# Altium PCB CH32H417QEU-R1.PcbDoc (part 5 of 6)
Units mm, origin at the board's own origin, x right, y up, seen from the top; angles counter-clockwise.
Board outline 125 x 85 mm, 4 copper layers (Top Layer, Layer 1, Layer 2, Bottom Layer), stack 0.603 mm thick; 271 components, 256 nets, 1068 pads, 903 vias.
Unrouted connection lines stored in the file: 143.
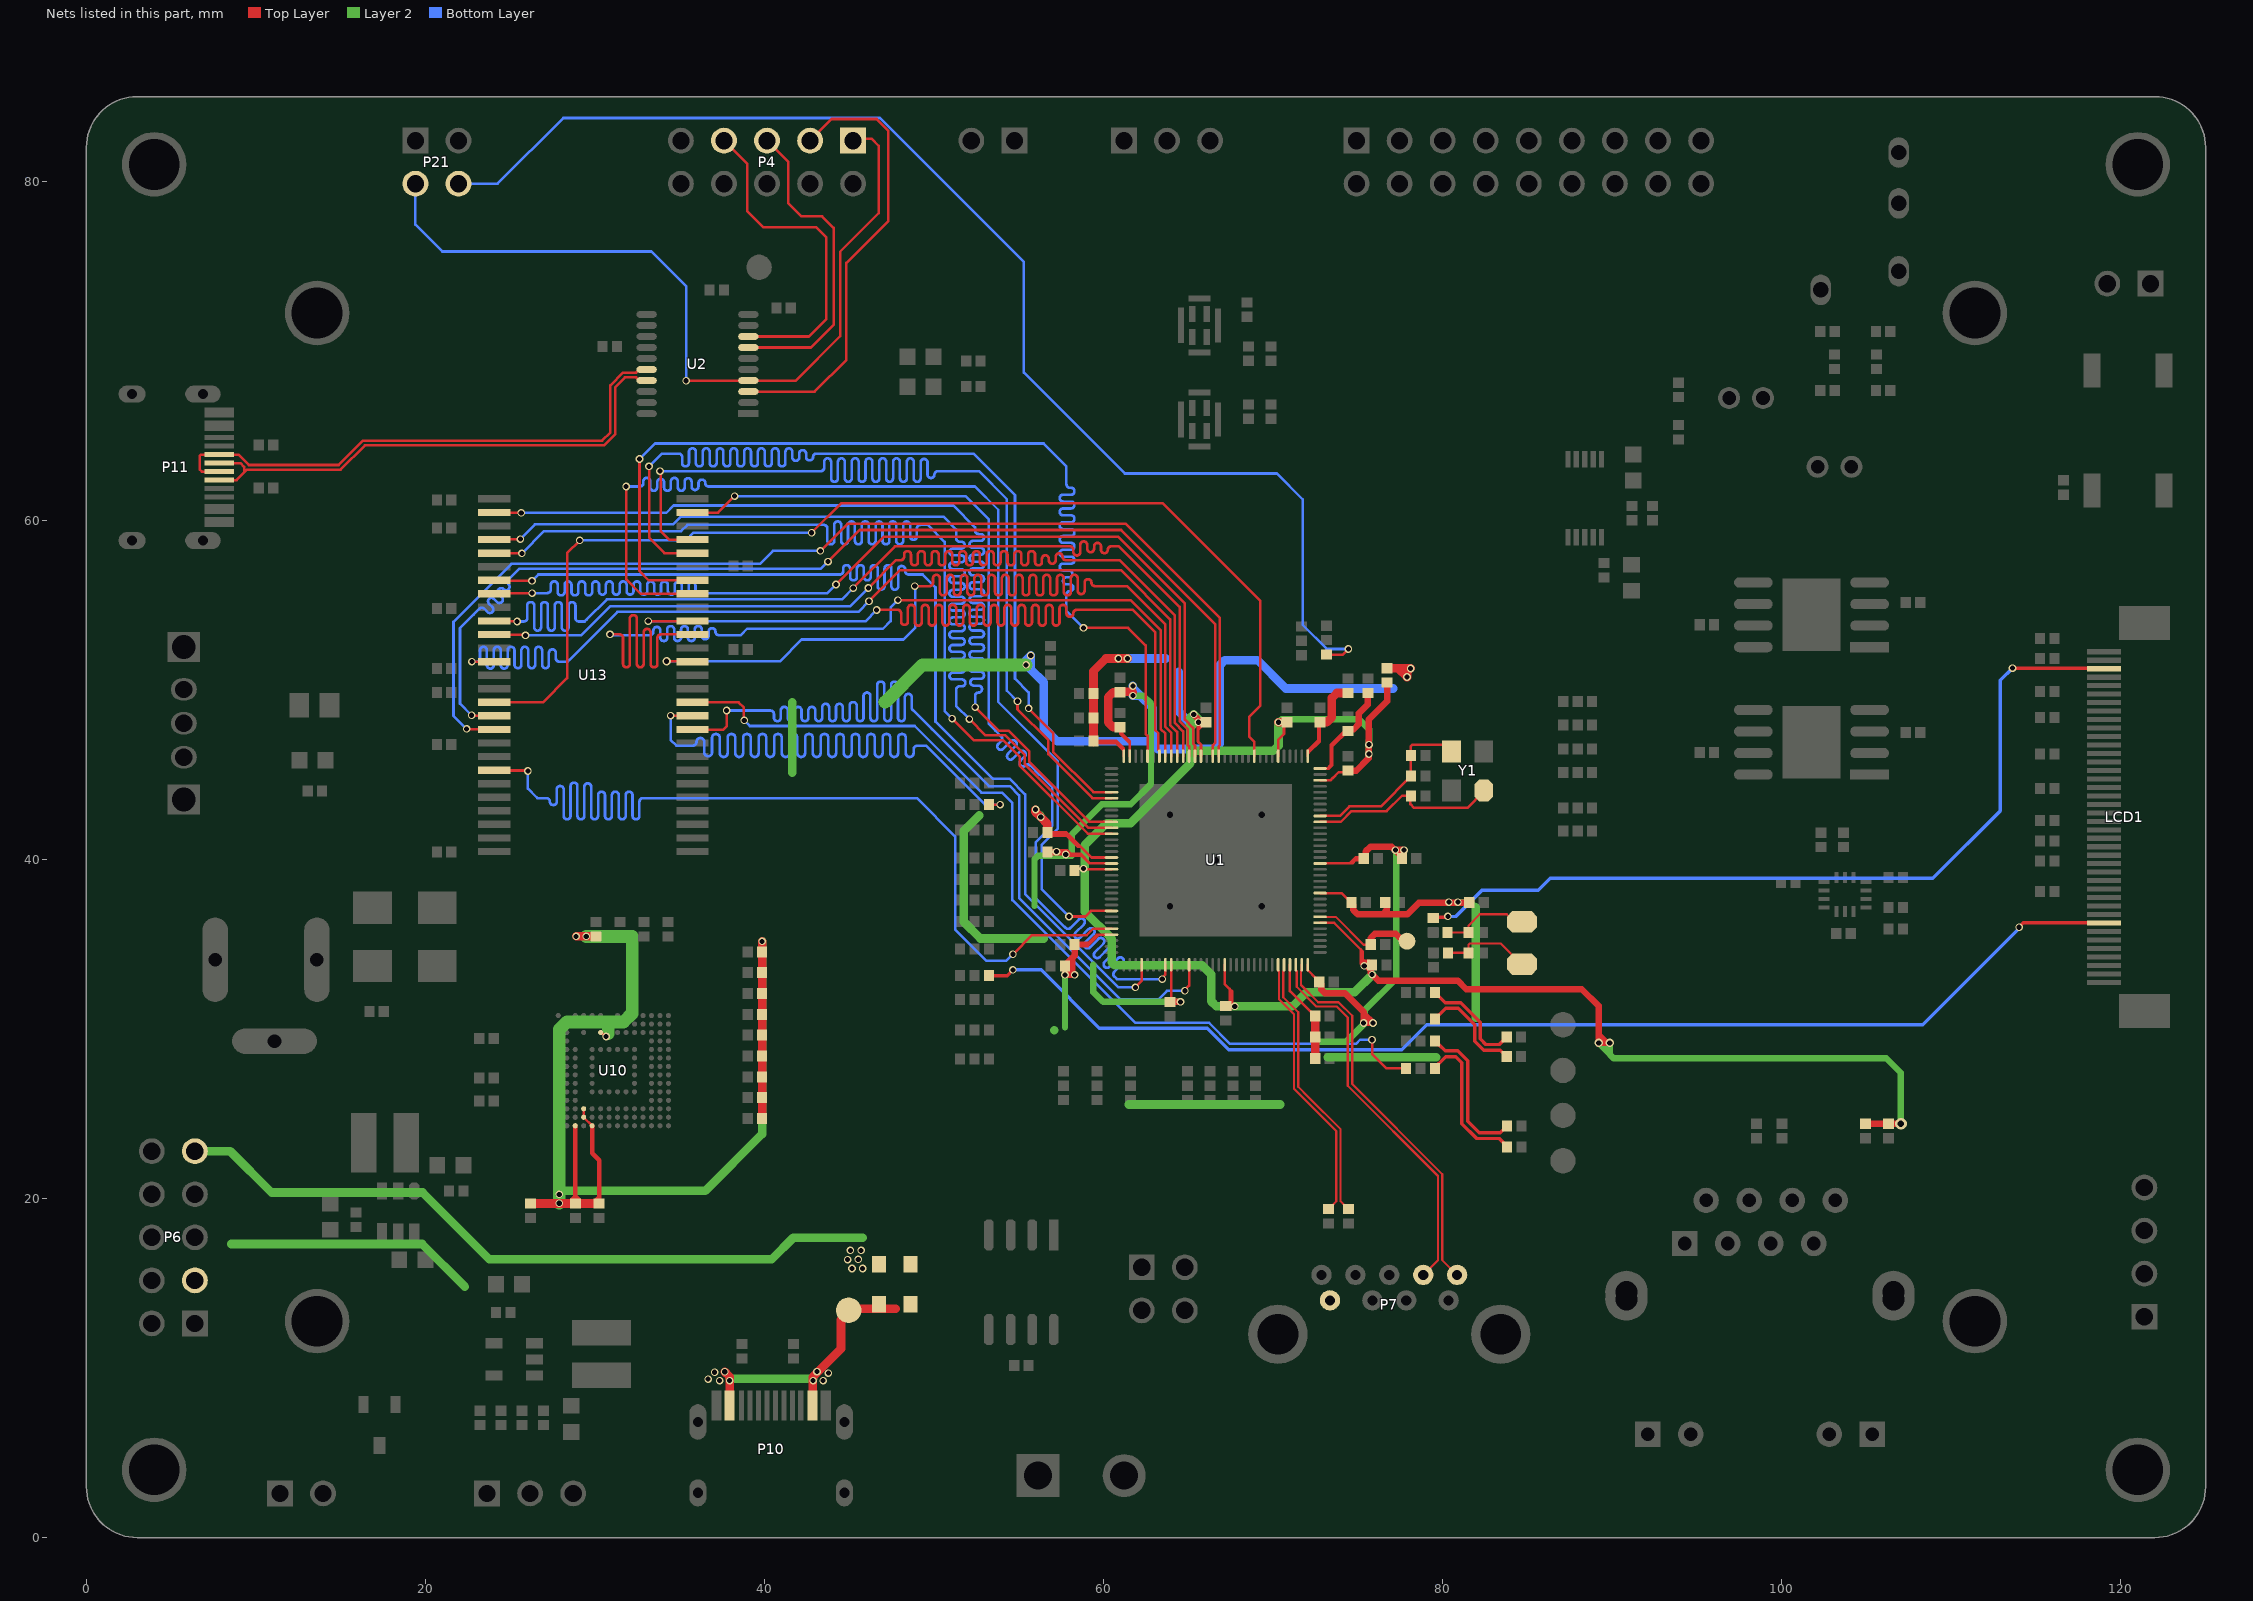
[diagram p7: the nets of this part, all layers, seen from the top]

## Via types
v1: diameter 0.45, hole 0.3, Top Layer to Bottom Layer, tented both sides, 534 vias
v2: diameter 0.5, hole 0.3, Top Layer to Bottom Layer, tented both sides, 320 vias
v3: diameter 0.711, hole 0.406, Top Layer to Bottom Layer, tented both sides, 24 vias
v4: diameter 0.508, hole 0.305, Top Layer to Bottom Layer, tented both sides, 22 vias
v5: diameter 0.7, hole 0.4, Top Layer to Bottom Layer, tented both sides, 3 vias

## Nets (pads, with @x,y where several pads share a name; then routed paths per layer and width w, separated by ;. In a path a pad name is that pad's centre, name@x,y a point inside that pad or via, vN(x,y) a via of type N, cw(c..) or ccw(c..) an arc to the next point about the centre after c; other vN are vias at no path point) (continued)
SDRAM_BA1: U1.92 U13.21 | length 66.3
  Top Layer w0.152: U13.21@24.064,45.27 24.088,45.246 26.011,45.246 v1(26.035,45.221) ; v1(54.648,34.408) 55.773,35.533 59.005,35.533 59.389,35.917 U1.92@60.466,35.917
  Bottom Layer w0.152: v1(26.035,45.221) 26.035,44.188 26.564,43.66 26.607,43.617 27.134,43.617 cw(c27.134,43.413) 27.337,43.413 ccw(c27.54,43.413) 27.743,43.413 27.743,44.13 cw(c27.946,44.13) 28.15,44.13 28.15,42.571 ccw(c28.353,42.571) 28.556,42.571 28.556,44.332 cw(c28.759,44.332) 28.962,44.332 28.962,42.571 ccw(c29.166,42.571) 29.369,42.571 29.369,44.285 cw(c29.572,44.285) 29.775,44.285 29.775,42.571 ccw(c29.978,42.571) 30.182,42.571 30.182,43.794 cw(c30.385,43.794) 30.588,43.794 30.588,42.571 ccw(c30.791,42.571) 30.994,42.571 30.994,43.794 cw(c31.198,43.794) 31.401,43.794 31.401,42.571 ccw(c31.604,42.571) 31.807,42.571 31.807,43.794 cw(c32.01,43.794) 32.214,43.794 32.214,42.571 ccw(c32.417,42.571) 32.62,42.571 32.62,43.413 cw(c32.823,43.413) 32.823,43.617 32.899,43.617 48.993,43.617 51.242,41.367 51.242,35.861 53.065,34.037 54.269,34.037 54.639,34.408 v1(54.648,34.408)
SDRAM_D0: U1.74 U13.2 | length 66.3
  Top Layer w0.152: U13.2@24.064,60.47 24.078,60.457 25.636,60.457 v1(25.649,60.443) ; v1(52.422,48.984) 53.811,47.595 54.4,47.595 55.622,46.373 55.622,45.759 59.164,42.217 U1.74@60.466,42.217
  Bottom Layer w0.152: v1(25.649,60.443) 34.202,60.443 34.638,60.879 51.136,60.879 52.422,59.593 52.422,59.473 52.422,59.397 ccw(c52.625,59.397) 52.625,59.194 52.743,59.194 cw(c52.743,58.991) 52.743,58.787 52.291,58.787 ccw(c52.291,58.584) 52.291,58.381 52.743,58.381 cw(c52.743,58.178) 52.743,57.975 52.291,57.975 ccw(c52.291,57.771) 52.291,57.568 52.743,57.568 cw(c52.743,57.365) 52.743,57.162 52.291,57.162 ccw(c52.291,56.959) 52.291,56.755 52.743,56.755 cw(c52.743,56.552) 52.743,56.349 52.291,56.349 ccw(c52.291,56.146) 52.291,55.943 52.743,55.943 cw(c52.743,55.739) 52.743,55.536 52.291,55.536 ccw(c52.291,55.333) 52.291,55.13 52.743,55.13 cw(c52.743,54.927) 52.743,54.723 52.291,54.723 ccw(c52.291,54.52) 52.291,54.317 52.743,54.317 cw(c52.743,54.114) 52.743,53.911 52.291,53.911 ccw(c52.291,53.707) 52.291,53.504 52.743,53.504 cw(c52.743,53.301) 52.743,53.098 52.291,53.098 ccw(c52.291,52.895) 52.291,52.691 52.743,52.691 cw(c52.743,52.488) 52.743,52.285 52.291,52.285 ccw(c52.291,52.082) 52.291,51.879 52.743,51.879 cw(c52.743,51.675) 52.743,51.472 52.291,51.472 ccw(c52.291,51.269) 52.291,51.066 52.743,51.066 cw(c52.743,50.863) 52.743,50.659 52.343,50.659 ccw(c52.343,50.456) 52.343,50.253 52.626,50.253 cw(c52.626,50.05) 52.626,49.847 ccw(c52.625,49.643) 52.422,49.643 52.422,49.321 v1(52.422,48.984)
SDRAM_D1: U1.75 U13.4 | length 66.3
  Top Layer w0.152: U13.4@24.064,58.87 24.077,58.883 25.584,58.883 v1(25.597,58.897) ; v1(52.084,48.276) 53.044,47.316 54.206,47.316 55.343,46.179 55.343,45.643 59.119,41.867 U1.75@60.466,41.867
  Bottom Layer w0.152: v1(25.597,58.897) 26.462,59.762 34.61,59.762 35.066,60.218 50.555,60.218 51.299,59.474 51.299,59.027 51.299,58.95 ccw(c51.502,58.95) 51.502,58.747 51.605,58.747 cw(c51.605,58.544) 51.605,58.341 51.108,58.341 ccw(c51.108,58.138) 51.108,57.934 51.605,57.934 cw(c51.605,57.731) 51.605,57.528 51.108,57.528 ccw(c51.108,57.325) 51.108,57.122 51.605,57.122 cw(c51.605,56.918) 51.605,56.715 51.108,56.715 ccw(c51.108,56.512) 51.108,56.309 51.605,56.309 cw(c51.605,56.106) 51.605,55.902 51.108,55.902 ccw(c51.108,55.699) 51.108,55.496 51.605,55.496 cw(c51.605,55.293) 51.605,55.09 51.108,55.09 ccw(c51.108,54.886) 51.108,54.683 51.605,54.683 cw(c51.605,54.48) 51.605,54.277 51.108,54.277 ccw(c51.108,54.074) 51.108,53.87 51.605,53.87 cw(c51.605,53.667) 51.605,53.464 51.108,53.464 ccw(c51.108,53.261) 51.108,53.058 51.605,53.058 cw(c51.605,52.854) 51.605,52.651 51.108,52.651 ccw(c51.108,52.448) 51.108,52.245 51.605,52.245 cw(c51.605,52.042) 51.605,51.838 51.108,51.838 ccw(c51.108,51.635) 51.108,51.432 51.605,51.432 cw(c51.605,51.229) 51.605,51.026 51.108,51.026 ccw(c51.108,50.822) 51.108,50.619 51.641,50.619 cw(c51.641,50.416) 51.641,50.213 51.502,50.213 ccw(c51.502,50.01) 51.299,50.01 51.299,49.432 51.299,49.06 v1(52.084,48.276)
SDRAM_D2: U1.76 U13.5 | length 66.3
  Top Layer w0.152: U13.5@24.064,58.07 24.07,58.064 25.682,58.064 v1(25.689,58.058) ; v1(51.062,48.31) 52.336,47.036 54.069,47.036 55.063,46.043 55.063,45.527 59.074,41.517 U1.76@60.466,41.517
  Bottom Layer w0.152: v1(25.689,58.058) 27,59.369 35.086,59.369 35.449,59.732 43.02,59.732 43.502,59.732 cw(c43.502,59.529) 43.705,59.529 43.705,58.792 ccw(c43.909,58.792) 44.112,58.792 44.112,59.735 cw(c44.315,59.735) 44.518,59.735 44.518,58.792 ccw(c44.721,58.792) 44.925,58.792 44.925,59.735 cw(c45.128,59.735) 45.331,59.735 45.331,58.792 ccw(c45.534,58.792) 45.737,58.792 45.737,59.735 cw(c45.941,59.735) 46.144,59.735 46.144,58.792 ccw(c46.347,58.792) 46.55,58.792 46.55,59.735 cw(c46.753,59.735) 46.957,59.735 46.957,58.792 ccw(c47.16,58.792) 47.363,58.792 47.363,59.735 cw(c47.566,59.735) 47.769,59.735 47.769,58.792 ccw(c47.973,58.792) 48.176,58.792 48.176,59.735 cw(c48.379,59.735) 48.582,59.735 48.582,59.058 ccw(c48.785,59.058) 48.989,59.058 48.989,59.529 cw(c49.192,59.529) 49.192,59.732 49.506,59.732 49.63,59.732 50.625,58.737 50.625,48.747 v1(51.062,48.31)
SDRAM_D3: U1.100 U13.7 | length 66.3
  Top Layer w0.152: U13.7@24.064,56.47 24.082,56.452 26.263,56.452 v1(26.28,56.435) ; v1(61.874,32.458) 61.874,32.472 62.241,32.84 U1.100@62.241,33.792
  Bottom Layer w0.152: v1(26.28,56.435) 26.654,56.809 44.358,56.809 44.434,56.809 ccw(c44.434,57.012) 44.637,57.012 44.637,57.163 cw(c44.841,57.163) 45.044,57.163 45.044,56.662 ccw(c45.247,56.662) 45.45,56.662 45.45,57.163 cw(c45.653,57.163) 45.857,57.163 45.857,56.669 ccw(c46.06,56.669) 46.263,56.669 46.263,57.163 cw(c46.466,57.163) 46.669,57.163 46.669,56.117 ccw(c46.873,56.117) 47.076,56.117 47.076,57.163 cw(c47.279,57.163) 47.482,57.163 47.482,56.117 ccw(c47.685,56.117) 47.889,56.117 47.889,57.108 cw(c48.092,57.108) 48.295,57.108 48.295,57.012 ccw(c48.498,57.012) 48.498,56.809 49.321,56.809 50.085,56.045 50.085,48.131 53.45,44.765 54.441,44.765 55.371,43.835 55.371,37.961 60.874,32.458 v1(61.874,32.458)
SDRAM_D4: U1.52 U13.8 | length 66.3
  Top Layer w0.152: U13.8@24.064,55.67 24.086,55.692 26.269,55.692 v1(26.291,55.714) ; v1(44.216,56.22) 47.034,59.038 60.861,59.038 64.797,55.103 64.797,48.246 65.277,47.767 65.277,46.827 65.391,46.712 U1.52@65.391,46.092
  Bottom Layer w0.152: v1(26.291,55.714) 27.113,55.714 27.189,55.714 ccw(c27.189,55.917) 27.392,55.917 27.392,56.197 cw(c27.596,56.197) 27.799,56.197 27.799,55.778 ccw(c28.002,55.778) 28.205,55.778 28.205,56.197 cw(c28.408,56.197) 28.612,56.197 28.612,55.778 ccw(c28.815,55.778) 29.018,55.778 29.018,56.197 cw(c29.221,56.197) 29.424,56.197 29.424,55.778 ccw(c29.628,55.778) 29.831,55.778 29.831,56.197 cw(c30.034,56.197) 30.237,56.197 30.237,55.821 ccw(c30.44,55.821) 30.644,55.821 30.644,56.197 cw(c30.847,56.197) 31.05,56.197 31.05,55.826 ccw(c31.253,55.826) 31.456,55.826 31.456,56.197 cw(c31.66,56.197) 31.863,56.197 31.863,55.826 ccw(c32.066,55.826) 32.269,55.826 32.269,56.197 cw(c32.472,56.197) 32.676,56.197 32.676,55.826 ccw(c32.879,55.826) 33.082,55.826 33.082,56.197 cw(c33.285,56.197) 33.488,56.197 33.488,55.826 ccw(c33.692,55.826) 33.895,55.826 33.895,56.197 cw(c34.098,56.197) 34.301,56.197 34.301,55.826 ccw(c34.504,55.826) 34.708,55.826 34.708,56.197 cw(c34.911,56.197) 35.114,56.197 35.114,55.826 ccw(c35.317,55.826) 35.52,55.826 35.52,56.151 cw(c35.724,56.151) 35.927,56.151 35.927,55.917 ccw(c36.13,55.917) 36.13,55.714 37.376,55.714 43.71,55.714 v1(44.216,56.22)
SDRAM_D5: U1.53 U13.10 | length 66.3
  Top Layer w0.152: U13.10@24.064,54.07 24.08,54.054 25.39,54.054 v1(25.406,54.038) ; v1(45.231,56.005) 47.696,58.471 57.532,58.471 58.015,58.471 cw(c58.015,58.267) 58.218,58.267 58.218,58.134 ccw(c58.421,58.134) 58.624,58.134 58.624,58.556 cw(c58.827,58.556) 59.031,58.556 59.031,58.325 ccw(c59.234,58.325) 59.437,58.325 59.437,58.471 cw(c59.64,58.471) 59.843,58.471 59.843,58.267 ccw(c60.047,58.267) 60.25,58.267 cw(c60.453,58.267) 60.453,58.471 60.899,58.471 61.027,58.342 64.48,54.89 64.48,48.168 64.971,47.677 64.971,46.737 65.041,46.667 U1.53@65.041,46.092
  Bottom Layer w0.152: v1(25.406,54.038) 25.725,54.038 25.801,54.038 ccw(c25.801,54.241) 26.004,54.241 26.004,54.978 cw(c26.208,54.978) 26.411,54.978 26.411,53.699 ccw(c26.614,53.699) 26.817,53.699 26.817,54.978 cw(c27.02,54.978) 27.224,54.978 27.224,53.699 ccw(c27.427,53.699) 27.63,53.699 27.63,54.978 cw(c27.833,54.978) 28.036,54.978 28.036,53.699 ccw(c28.24,53.699) 28.443,53.699 28.443,54.978 cw(c28.646,54.978) 28.849,54.978 28.849,54.241 ccw(c29.052,54.241) 29.052,54.038 29.392,54.038 29.504,54.15 30.698,55.343 44.576,55.343 45.231,55.998 v1(45.231,56.005)
SDRAM_D6: U1.54 U13.11 | length 66.3
  Top Layer w0.152: U13.11@24.064,53.269 24.09,53.243 25.872,53.243 v1(25.898,53.217) ; v1(46.127,56.013) 47.766,57.652 47.953,57.652 48.029,57.652 ccw(c48.029,57.855) 48.233,57.855 48.233,57.988 cw(c48.436,57.988) 48.639,57.988 48.639,57.551 ccw(c48.842,57.551) 49.045,57.551 49.045,57.988 cw(c49.249,57.988) 49.452,57.988 49.452,57.551 ccw(c49.655,57.551) 49.858,57.551 49.858,57.988 cw(c50.061,57.988) 50.265,57.988 50.265,57.551 ccw(c50.468,57.551) 50.671,57.551 50.671,57.988 cw(c50.874,57.988) 51.077,57.988 51.077,57.551 ccw(c51.281,57.551) 51.484,57.551 51.484,57.988 cw(c51.687,57.988) 51.89,57.988 51.89,57.551 ccw(c52.093,57.551) 52.297,57.551 52.297,57.988 cw(c52.5,57.988) 52.703,57.988 52.703,57.551 ccw(c52.906,57.551) 53.109,57.551 53.109,57.988 cw(c53.313,57.988) 53.516,57.988 53.516,57.551 ccw(c53.719,57.551) 53.922,57.551 53.922,57.988 cw(c54.125,57.988) 54.329,57.988 54.329,57.551 ccw(c54.532,57.551) 54.735,57.551 54.735,57.988 cw(c54.938,57.988) 55.141,57.988 55.141,57.551 ccw(c55.345,57.551) 55.548,57.551 55.548,57.988 cw(c55.751,57.988) 55.954,57.988 55.954,57.551 ccw(c56.157,57.551) 56.361,57.551 56.361,57.735 cw(c56.564,57.735) 56.767,57.735 56.767,57.652 ccw(c56.97,57.652) 57.173,57.652 57.173,57.855 cw(c57.377,57.855) 57.58,57.855 ccw(c57.783,57.855) 57.783,57.652 58.524,57.652 60.93,57.652 64.2,54.381 64.2,48.053 64.691,47.562 U1.54@64.691,46.092
  Bottom Layer w0.152: v1(25.898,53.217) 29.171,53.217 30.887,54.932 45.047,54.932 v1(46.127,56.013)
SDRAM_D7: U1.55 U13.13 | length 66.3
  Top Layer w0.152: v1(22.734,51.667) 22.735,51.669 24.062,51.669 U13.13@24.064,51.67 ; v1(46.163,55.232) 48,57.069 61.018,57.069 63.921,54.166 63.921,47.937 64.341,47.517 U1.55@64.341,46.092
  Bottom Layer w0.152: v1(22.734,51.667) 22.939,51.667 23.015,51.667 ccw(c23.015,51.871) 23.218,51.871 23.218,52.342 cw(c23.422,52.342) 23.625,52.342 23.625,51.462 ccw(c23.828,51.462) 24.031,51.462 24.031,52.342 cw(c24.234,52.342) 24.438,52.342 24.438,51.462 ccw(c24.641,51.462) 24.844,51.462 24.844,52.342 cw(c25.047,52.342) 25.25,52.342 25.25,51.483 ccw(c25.454,51.483) 25.657,51.483 25.657,52.342 cw(c25.86,52.342) 26.063,52.342 26.063,51.483 ccw(c26.266,51.483) 26.47,51.483 26.47,52.342 cw(c26.673,52.342) 26.876,52.342 26.876,51.483 ccw(c27.079,51.483) 27.282,51.483 27.282,52.19 cw(c27.486,52.19) 27.689,52.19 27.689,51.871 ccw(c27.892,51.871) 27.892,51.667 28.381,51.667 28.486,51.772 31.319,54.606 45.537,54.606 v1(46.163,55.232)
SDRAM_D8: U1.56 U13.42 | length 66.3
  Top Layer w0.152: v2(34.227,51.692) 34.238,51.681 35.737,51.681 U13.42@35.748,51.67 ; v1(48.862,56.126) 49.657,56.126 49.733,56.126 ccw(c49.733,56.329) 49.936,56.329 49.936,56.586 cw(c50.139,56.586) 50.343,56.586 50.343,55.778 ccw(c50.546,55.778) 50.749,55.778 50.749,56.586 cw(c50.952,56.586) 51.155,56.586 51.155,55.778 ccw(c51.359,55.778) 51.562,55.778 51.562,56.586 cw(c51.765,56.586) 51.968,56.586 51.968,55.778 ccw(c52.171,55.778) 52.375,55.778 52.375,56.586 cw(c52.578,56.586) 52.781,56.586 52.781,55.778 ccw(c52.984,55.778) 53.187,55.778 53.187,56.586 cw(c53.391,56.586) 53.594,56.586 53.594,55.778 ccw(c53.797,55.778) 54,55.778 54,56.586 cw(c54.203,56.586) 54.407,56.586 54.407,55.778 ccw(c54.61,55.778) 54.813,55.778 54.813,56.586 cw(c55.016,56.586) 55.219,56.586 55.219,55.778 ccw(c55.423,55.778) 55.626,55.778 55.626,56.586 cw(c55.829,56.586) 56.032,56.586 56.032,55.778 ccw(c56.235,55.778) 56.439,55.778 56.439,56.586 cw(c56.642,56.586) 56.845,56.586 56.845,55.778 ccw(c57.048,55.778) 57.251,55.778 57.251,56.586 cw(c57.455,56.586) 57.658,56.586 57.658,55.778 ccw(c57.861,55.778) 58.064,55.778 58.064,56.586 cw(c58.267,56.586) 58.471,56.586 58.471,55.856 ccw(c58.674,55.856) 58.877,55.856 58.877,56.329 cw(c59.08,56.329) 59.283,56.329 ccw(c59.487,56.329) 59.487,56.126 60.37,56.126 61.366,56.126 63.641,53.85 63.641,47.821 63.991,47.471 U1.56@63.991,46.092
  Bottom Layer w0.152: v2(34.227,51.692) 34.236,51.683 40.903,51.683 42.193,52.973 48.193,52.973 48.898,53.679 48.898,56.09 v1(48.862,56.126)
SDRAM_D9: U1.57 U13.44 | length 66.3
  Top Layer w0.152: v1(30.882,53.277) 30.886,53.273 30.966,53.273 31.448,53.273 cw(c31.448,53.07) 31.652,53.07 31.652,51.54 ccw(c31.855,51.54) 32.058,51.54 32.058,54.213 cw(c32.261,54.213) 32.464,54.213 32.464,51.54 ccw(c32.668,51.54) 32.871,51.54 32.871,53.398 cw(c33.074,53.398) 33.277,53.398 33.277,51.54 ccw(c33.48,51.54) 33.684,51.54 33.684,53.07 cw(c33.887,53.07) 33.887,53.273 34.317,53.273 35.744,53.273 U13.44@35.748,53.269 ; v1(47.863,55.295) 61.598,55.295 63.362,53.531 63.362,47.706 63.641,47.426 U1.57@63.641,46.092
  Bottom Layer w0.152: v1(30.882,53.277) 30.926,53.233 33.168,53.233 33.244,53.233 ccw(c33.244,53.436) 33.447,53.436 33.447,53.515 cw(c33.651,53.515) 33.854,53.515 33.854,53.088 ccw(c34.057,53.088) 34.26,53.088 34.26,53.561 cw(c34.463,53.561) 34.667,53.561 34.667,53.088 ccw(c34.87,53.088) 35.073,53.088 35.073,53.561 cw(c35.276,53.561) 35.479,53.561 35.479,53.088 ccw(c35.683,53.088) 35.886,53.088 35.886,53.561 cw(c36.089,53.561) 36.292,53.561 36.292,53.192 ccw(c36.495,53.192) 36.699,53.192 36.699,53.436 cw(c36.902,53.436) 37.105,53.436 ccw(c37.308,53.436) 37.308,53.233 38.371,53.233 38.598,53.233 38.974,53.609 46.98,53.609 47.439,54.068 47.439,54.872 v1(47.863,55.295)
SDRAM_D10: U1.58 U13.45 | length 66.2
  Top Layer w0.152: v1(33.142,54.055) 33.15,54.062 35.74,54.062 U13.45@35.748,54.07 ; v1(46.612,54.714) 46.622,54.724 47.366,54.724 47.849,54.724 cw(c47.849,54.521) 48.052,54.521 48.052,54.041 ccw(c48.255,54.041) 48.459,54.041 48.459,54.813 cw(c48.662,54.813) 48.865,54.813 48.865,54 ccw(c49.068,54) 49.271,54 49.271,54.813 cw(c49.475,54.813) 49.678,54.813 49.678,54 ccw(c49.881,54) 50.084,54 50.084,54.813 cw(c50.287,54.813) 50.491,54.813 50.491,54 ccw(c50.694,54) 50.897,54 50.897,54.813 cw(c51.1,54.813) 51.303,54.813 51.303,54 ccw(c51.507,54) 51.71,54 51.71,54.813 cw(c51.913,54.813) 52.116,54.813 52.116,54 ccw(c52.319,54) 52.523,54 52.523,54.813 cw(c52.726,54.813) 52.929,54.813 52.929,54 ccw(c53.132,54) 53.335,54 53.335,54.813 cw(c53.539,54.813) 53.742,54.813 53.742,54 ccw(c53.945,54) 54.148,54 54.148,54.813 cw(c54.351,54.813) 54.555,54.813 54.555,54 ccw(c54.758,54) 54.961,54 54.961,54.813 cw(c55.164,54.813) 55.367,54.813 55.367,54 ccw(c55.571,54) 55.774,54 55.774,54.813 cw(c55.977,54.813) 56.18,54.813 56.18,54 ccw(c56.383,54) 56.587,54 56.587,54.813 cw(c56.79,54.813) 56.993,54.813 56.993,54 ccw(c57.196,54) 57.399,54 57.399,54.813 cw(c57.603,54.813) 57.806,54.813 57.806,54.517 ccw(c58.009,54.517) 58.212,54.517 58.212,54.521 cw(c58.415,54.521) 58.415,54.724 58.77,54.724 61.72,54.724 63.035,53.409 63.035,47.634 63.224,47.445 63.224,46.481 63.291,46.414 U1.58@63.291,46.092
  Bottom Layer w0.152: v1(33.142,54.055) 33.153,54.044 45.942,54.044 v1(46.612,54.714)
SDRAM_D11: U1.89 U13.47 | length 66.3
  Top Layer w0.152: v1(31.838,61.998) 31.838,56.531 32.698,55.67 U13.47@35.748,55.67 ; v1(57.957,36.638) 58.925,36.638 59.254,36.967 U1.89@60.466,36.967
  Bottom Layer w0.152: v1(31.838,61.998) 32.572,61.998 32.648,61.998 ccw(c32.648,62.201) 32.851,62.201 32.851,62.302 cw(c33.054,62.302) 33.258,62.302 33.258,61.95 ccw(c33.461,61.95) 33.664,61.95 33.664,62.247 cw(c33.867,62.247) 34.07,62.247 34.07,61.95 ccw(c34.274,61.95) 34.477,61.95 34.477,62.302 cw(c34.68,62.302) 34.883,62.302 34.883,61.95 ccw(c35.086,61.95) 35.29,61.95 35.29,62.287 cw(c35.493,62.287) 35.696,62.287 35.696,61.998 ccw(c35.899,61.998) 36.102,61.998 36.102,62.201 cw(c36.306,62.201) 36.509,62.201 ccw(c36.712,62.201) 36.712,61.998 38.125,61.998 52.416,61.998 53.786,60.628 53.786,49.295 57.296,45.785 57.296,41.813 56.344,40.86 56.344,38.251 v1(57.957,36.638)
SDRAM_D12: U1.60 U13.48 | length 66.3
  Top Layer w0.152: v1(32.622,63.618) 32.622,57.015 33.167,56.47 U13.48@35.748,56.47 ; v1(58.812,53.658) 61.452,53.658 62.476,52.633 62.476,47.403 62.591,47.288 U1.60@62.591,46.092
  Bottom Layer w0.152: v1(32.622,63.618) 33.538,64.534 56.459,64.534 57.807,63.186 57.807,62.202 57.807,62.126 ccw(c58.01,62.126) 58.01,61.923 58.077,61.923 cw(c58.077,61.72) 58.077,61.516 57.612,61.516 ccw(c57.612,61.313) 57.612,61.11 58.077,61.11 cw(c58.077,60.907) 58.077,60.704 57.612,60.704 ccw(c57.612,60.5) 57.612,60.297 58.077,60.297 cw(c58.077,60.094) 58.077,59.891 57.612,59.891 ccw(c57.612,59.688) 57.612,59.484 58.077,59.484 cw(c58.077,59.281) 58.077,59.078 57.612,59.078 ccw(c57.612,58.875) 57.612,58.672 58.077,58.672 cw(c58.077,58.468) 58.077,58.265 57.612,58.265 ccw(c57.612,58.062) 57.612,57.859 58.077,57.859 cw(c58.077,57.656) 58.077,57.452 57.612,57.452 ccw(c57.612,57.249) 57.612,57.046 57.959,57.046 cw(c57.959,56.843) 57.959,56.64 57.807,56.64 ccw(c57.807,56.436) 57.807,56.233 58.01,56.233 cw(c58.01,56.03) 58.01,55.827 ccw(c58.01,55.624) 57.807,55.624 57.807,54.992 57.807,54.663 v1(58.812,53.658)
SDRAM_D13: U1.69 U13.50 | length 66.3
  Top Layer w0.152: v1(33.187,63.188) 33.187,58.983 34.1,58.07 U13.50@35.748,58.07 ; v1(55.575,48.91) 57.019,47.466 57.019,46.337 59.389,43.967 U1.69@60.466,43.967
  Bottom Layer w0.152: v1(33.187,63.188) 33.941,63.941 34.451,63.941 34.934,63.941 cw(c34.934,63.738) 35.137,63.738 35.137,63.386 ccw(c35.34,63.386) 35.544,63.386 35.544,64.052 cw(c35.747,64.052) 35.95,64.052 35.95,63.386 ccw(c36.153,63.386) 36.356,63.386 36.356,64.052 cw(c36.56,64.052) 36.763,64.052 36.763,63.386 ccw(c36.966,63.386) 37.169,63.386 37.169,64.052 cw(c37.372,64.052) 37.576,64.052 37.576,63.386 ccw(c37.779,63.386) 37.982,63.386 37.982,64.052 cw(c38.185,64.052) 38.388,64.052 38.388,63.386 ccw(c38.592,63.386) 38.795,63.386 38.795,64.052 cw(c38.998,64.052) 39.201,64.052 39.201,63.386 ccw(c39.404,63.386) 39.608,63.386 39.608,64.052 cw(c39.811,64.052) 40.014,64.052 40.014,63.386 ccw(c40.217,63.386) 40.42,63.386 40.42,64.052 cw(c40.624,64.052) 40.827,64.052 40.827,63.386 ccw(c41.03,63.386) 41.233,63.386 41.233,64.052 cw(c41.436,64.052) 41.64,64.052 41.64,63.717 ccw(c41.843,63.717) 42.046,63.717 42.046,63.941 cw(c42.249,63.941) 42.452,63.941 42.452,63.738 ccw(c42.656,63.738) 42.859,63.738 cw(c43.062,63.738) 43.062,63.941 43.672,63.941 52.325,63.941 54.771,61.495 54.771,50.662 55.575,49.858 v1(55.575,48.91)
SDRAM_D14: U1.70 U13.51 | length 66.3
  Top Layer w0.152: v1(33.832,62.904) 33.871,62.865 33.871,59.376 34.376,58.87 U13.51@35.748,58.87 ; v1(54.92,49.331) 54.92,48.858 56.74,47.038 56.74,46.222 59.344,43.617 U1.70@60.466,43.617
  Bottom Layer w0.152: v1(33.832,62.904) 43.237,62.904 43.313,62.904 ccw(c43.313,63.107) 43.517,63.107 43.517,63.459 cw(c43.72,63.459) 43.923,63.459 43.923,62.481 ccw(c44.126,62.481) 44.329,62.481 44.329,63.459 cw(c44.533,63.459) 44.736,63.459 44.736,62.481 ccw(c44.939,62.481) 45.142,62.481 45.142,63.459 cw(c45.345,63.459) 45.549,63.459 45.549,62.481 ccw(c45.752,62.481) 45.955,62.481 45.955,63.459 cw(c46.158,63.459) 46.361,63.459 46.361,62.481 ccw(c46.565,62.481) 46.768,62.481 46.768,63.459 cw(c46.971,63.459) 47.174,63.459 47.174,62.481 ccw(c47.377,62.481) 47.581,62.481 47.581,63.459 cw(c47.784,63.459) 47.987,63.459 47.987,62.481 ccw(c48.19,62.481) 48.393,62.481 48.393,63.459 cw(c48.597,63.459) 48.8,63.459 48.8,62.481 ccw(c49.003,62.481) 49.206,62.481 49.206,63.423 cw(c49.409,63.423) 49.613,63.423 49.613,62.701 ccw(c49.816,62.701) 50.019,62.701 cw(c50.222,62.701) 50.222,62.904 51.145,62.904 52.637,62.904 54.286,61.255 54.286,49.966 v1(54.92,49.331)
SDRAM_D15: U1.104 U13.53 | length 66.3
  Top Layer w0.152: U13.53@35.748,60.47 35.755,60.463 37.267,60.463 v1(38.233,61.429) ; v1(63.457,32.937) 63.457,33.018 63.641,33.203 U1.104@63.641,33.792
  Bottom Layer w0.152: v1(38.233,61.429) 51.863,61.429 53.226,60.066 53.226,47.996 53.614,47.608 53.667,47.554 53.955,47.267 cw(c53.811,47.123) 53.955,46.979 53.788,46.813 ccw(c53.932,46.669) 53.788,46.525 ccw(c53.932,46.669) 54.075,46.525 54.527,46.977 cw(c54.671,46.833) 54.814,46.977 cw(c54.671,46.833) 54.814,46.69 54.363,46.238 ccw(c54.506,46.094) 54.363,45.95 ccw(c54.506,46.094) 54.65,45.95 55.055,46.356 cw(c55.199,46.212) 55.343,46.356 cw(c55.199,46.212) 55.343,46.068 55.104,45.83 ccw(c55.248,45.686) 55.104,45.542 ccw(c55.248,45.686) 55.392,45.542 cw(c55.535,45.399) 55.679,45.542 56.226,44.995 56.28,44.941 56.978,44.243 56.978,42.005 55.987,41.014 55.987,37.74 57.707,36.021 57.761,35.967 ccw(c57.904,36.111) 58.048,35.967 58.546,36.465 cw(c58.69,36.321) 58.833,36.465 cw(c58.69,36.321) 58.833,36.178 58.335,35.68 ccw(c58.479,35.536) 58.335,35.392 ccw(c58.479,35.536) 58.623,35.392 59.121,35.89 cw(c59.264,35.747) 59.408,35.89 cw(c59.264,35.747) 59.408,35.603 58.91,35.105 ccw(c59.054,34.961) 58.91,34.818 ccw(c59.054,34.961) 59.197,34.818 59.695,35.316 cw(c59.839,35.172) 59.983,35.316 cw(c59.839,35.172) 59.983,35.028 59.485,34.53 ccw(c59.628,34.386) 59.485,34.243 ccw(c59.628,34.386) 59.772,34.243 60.27,34.741 cw(c60.414,34.597) 60.558,34.741 cw(c60.414,34.597) 60.558,34.453 60.06,33.955 ccw(c60.203,33.812) 60.06,33.668 ccw(c60.203,33.812) 60.347,33.668 60.845,34.166 cw(c60.989,34.022) 61.132,34.166 cw(c60.989,34.022) 61.132,33.879 60.634,33.381 ccw(c60.778,33.237) 60.634,33.093 60.789,32.939 61.128,32.939 63.455,32.939 v1(63.457,32.937)
SDRAM_DQM1: R54.1 U13.39 | length 55.5
  Top Layer w0.152: U13.39@35.748,49.27 38.472,49.27 38.775,48.966 38.775,48.236 v1(38.802,48.209) ; v1(75.834,29.366) 75.834,28.521 76.68,27.674 R54.1@77.844,27.674
  Bottom Layer w0.152: v1(38.802,48.209) 39.137,47.874 48.859,47.874 52.789,43.944 54.018,43.944 54.621,43.34 54.621,37.604 61.867,30.357 66.23,30.357 67.464,29.124 74.891,29.124 75.133,29.366 v1(75.834,29.366)
SDRAM_SDCKE0: U1.108 U13.37 | length 66.3
  Top Layer w0.152: U13.37@35.748,47.67 35.758,47.66 37.571,47.66 37.763,47.852 v1(37.763,48.785) ; v1(64.79,32.256) 64.79,32.303 65.041,32.554 U1.108@65.041,33.792
  Bottom Layer w0.152: v1(37.763,48.785) 39.87,48.785 40.352,48.785 cw(c40.352,48.581) 40.555,48.581 40.555,48.357 ccw(c40.759,48.357) 40.962,48.357 40.962,48.797 cw(c41.165,48.797) 41.368,48.797 41.368,48.357 ccw(c41.571,48.357) 41.775,48.357 41.775,48.797 cw(c41.978,48.797) 42.181,48.797 42.181,48.357 ccw(c42.384,48.357) 42.587,48.357 42.587,48.797 cw(c42.791,48.797) 42.994,48.797 42.994,48.357 ccw(c43.197,48.357) 43.4,48.357 43.4,48.979 cw(c43.603,48.979) 43.807,48.979 43.807,48.357 ccw(c44.01,48.357) 44.213,48.357 44.213,48.979 cw(c44.416,48.979) 44.619,48.979 44.619,48.357 ccw(c44.823,48.357) 45.026,48.357 45.026,49.078 cw(c45.229,49.078) 45.432,49.078 45.432,48.357 ccw(c45.635,48.357) 45.839,48.357 45.839,49.645 cw(c46.042,49.645) 46.245,49.645 46.245,48.357 ccw(c46.448,48.357) 46.651,48.357 46.651,50.291 cw(c46.855,50.291) 47.058,50.291 47.058,48.357 ccw(c47.261,48.357) 47.464,48.357 47.464,50.291 cw(c47.667,50.291) 47.871,50.291 47.871,48.357 ccw(c48.074,48.357) 48.277,48.357 48.277,49.561 cw(c48.48,49.561) 48.683,49.561 48.683,48.954 ccw(c48.887,48.954) 48.743,48.81 49.87,47.683 53.227,44.326 54.474,44.326 55.02,43.78 55.02,37.721 60.99,31.75 63.235,31.75 63.74,32.256 v1(64.79,32.256)
SDRAM_SDCLK: R11.1 U13.38 | length 56.3
  Top Layer w0.152: v1(34.459,48.481) 34.465,48.476 35.787,48.476 U13.38@35.791,48.472 ; R11.1@53.237,43.249 53.248,43.238 v1(53.895,43.238)
  Bottom Layer w0.152: v1(34.459,48.481) 34.459,47.053 34.803,46.71 34.998,46.71 35.76,46.71 ccw(c35.76,46.938) 35.989,46.938 cw(c36.217,46.938) 36.446,46.938 36.446,46.317 ccw(c36.674,46.317) 36.903,46.317 36.903,47.175 cw(c37.132,47.175) 37.36,47.175 37.36,46.27 ccw(c37.589,46.27) 37.817,46.27 37.817,47.175 cw(c38.046,47.175) 38.275,47.175 38.275,46.27 ccw(c38.503,46.27) 38.732,46.27 38.732,47.175 cw(c38.96,47.175) 39.189,47.175 39.189,46.27 ccw(c39.418,46.27) 39.646,46.27 39.646,47.175 cw(c39.875,47.175) 40.103,47.175 40.103,46.27 ccw(c40.332,46.27) 40.561,46.27 40.561,47.175 cw(c40.789,47.175) 41.018,47.175 41.018,46.27 ccw(c41.246,46.27) 41.475,46.27 41.475,47.175 cw(c41.704,47.175) 41.932,47.175 41.932,46.27 ccw(c42.161,46.27) 42.389,46.27 42.389,47.175 cw(c42.618,47.175) 42.847,47.175 42.847,46.27 ccw(c43.075,46.27) 43.304,46.27 43.304,47.175 cw(c43.532,47.175) 43.761,47.175 43.761,46.27 ccw(c43.99,46.27) 44.218,46.27 44.218,47.175 cw(c44.447,47.175) 44.675,47.175 44.675,46.27 ccw(c44.904,46.27) 45.133,46.27 45.133,47.175 cw(c45.361,47.175) 45.59,47.175 45.59,46.27 ccw(c45.818,46.27) 46.047,46.27 46.047,47.175 cw(c46.276,47.175) 46.504,47.175 46.504,46.27 ccw(c46.733,46.27) 46.961,46.27 46.961,47.175 cw(c47.19,47.175) 47.419,47.175 47.419,46.27 ccw(c47.647,46.27) 47.876,46.27 47.876,47.175 cw(c48.104,47.175) 48.333,47.175 48.333,46.27 ccw(c48.562,46.27) 48.79,46.27 48.79,46.481 cw(c49.019,46.481) 49.019,46.71 49.095,46.71 49.534,46.71 53.005,43.238 v1(53.895,43.238)
SDRAM_SDNCAS: U1.49 U13.17 | length 66.3
  Top Layer w0.152: v1(22.72,48.507) 22.739,48.489 24.045,48.489 U13.17@24.064,48.47 ; v1(43.74,57.572) 45.604,59.435 61.033,59.435 66.582,53.886 66.582,46.876 66.441,46.735 U1.49@66.441,46.092
  Bottom Layer w0.152: v1(22.72,48.507) 22.034,49.193 22.034,53.645 22.838,54.449 23.18,54.79 cw(c23.323,54.646) 23.467,54.79 23.657,54.599 ccw(c23.801,54.743) 23.945,54.599 ccw(c23.801,54.743) 23.945,54.887 23.75,55.082 cw(c23.894,55.225) 23.75,55.369 cw(c23.894,55.225) 24.037,55.369 24.219,55.188 ccw(c24.362,55.331) 24.506,55.188 ccw(c24.362,55.331) 24.506,55.475 24.325,55.656 cw(c24.468,55.8) 24.325,55.944 cw(c24.468,55.8) 24.612,55.944 24.616,55.939 ccw(c24.76,56.083) 24.904,55.939 ccw(c24.76,56.083) 24.904,56.227 cw(c25.047,56.37) 24.904,56.514 25.277,56.887 25.546,57.156 43.325,57.156 v1(43.74,57.572)
SDRAM_SDNRAS: U1.48 U13.18 | length 66.4
  Top Layer w0.152: v1(22.427,47.706) 22.444,47.688 24.046,47.688 U13.18@24.064,47.67 ; v1(43.294,58.204) 44.891,59.801 61.311,59.801 66.862,54.249 66.862,46.761 66.791,46.69 U1.48@66.791,46.092
  Bottom Layer w0.152: v1(22.427,47.706) 22.416,47.706 21.654,48.468 21.654,54.02 25.07,57.436 39.724,57.436 40.492,58.204 v1(43.294,58.204)
SDRAM_SDNWE: U1.42 U13.16 | length 66.3
  Top Layer w0.152: U13.16@24.064,49.27 26.93,49.27 28.361,50.701 28.361,58.08 v1(29.102,58.821) ; v1(42.781,59.272) 44.53,61.02 63.482,61.02 69.25,55.252 69.25,49.078 68.586,48.414 68.586,47.241 68.891,46.936 U1.42@68.891,46.092
  Bottom Layer w0.152: v1(29.102,58.821) 35.366,58.821 35.823,59.278 42.775,59.278 v1(42.781,59.272)
SERDES_RXN: C80.1 R61.1 | length 6.3
  Top Layer w0.203: R61.1@79.544,32.147 79.544,32.122 79.742,31.923 79.767,31.923 80.145,31.545 81.059,31.545 82.213,30.392 82.213,29.423 82.55,29.086 83.329,29.086 C80.1@83.776,29.533
SERDES_RXP: C79.1 R59.1 | length 6.3
  Top Layer w0.203: R59.1@79.544,30.578 79.544,30.603 79.742,30.801 79.767,30.801 80.181,31.215 80.923,31.215 81.883,30.255 81.883,29.286 82.413,28.756 83.399,28.756 C79.1@83.776,28.38 ; C79.1@83.776,28.367 C79.1@83.776,28.38 ; C79.1@83.776,28.392 C79.1@83.776,28.38
SERDES_TXN: C78.1 R57.1 | length 8.8
  Top Layer w0.203: R57.1@79.544,29.282 79.742,29.084 79.767,29.084 80.145,28.706 80.899,28.706 81.466,28.139 81.466,24.556 82.15,23.872 83.404,23.872 83.793,24.261 C78.1@83.793,24.286
SERDES_TXP: C77.1 R55.1 | length 8.8
  Top Layer w0.203: R55.1@79.544,27.738 79.544,27.763 79.742,27.962 79.767,27.962 80.181,28.376 80.762,28.376 81.136,28.002 81.136,24.42 82.014,23.542 83.329,23.542 83.793,23.078 C77.1@83.793,23.053
TDI: P4.7 U2.8 | length 19.9
  Top Layer w0.152: P4.7@37.605,82.4 38.984,81.021 38.984,78.227 39.914,77.297 43.047,77.297 43.636,76.708 43.636,71.862 42.621,70.848 40.617,70.848 U2.8@39.044,70.848
TDO: P4.5 U2.7 | length 18.8
  Top Layer w0.152: U2.7@39.044,70.197 40.052,70.197 42.731,70.197 44.072,71.538 44.072,77.251 43.391,77.932 42.188,77.932 41.387,78.733 41.387,81.158 P4.5@40.145,82.4
TOUCH_INT: LCD1.38 R3.1 | length 50.2
  Top Layer w0.203: R3.1@79.443,36.545 79.498,36.601 80.261,36.601 v1(80.308,36.648) ; v1(113.612,51.286) 113.63,51.268 118.981,51.268 LCD1.38@118.999,51.25
  Bottom Layer w0.203: v1(80.308,36.648) 80.318,36.637 80.77,36.637 82.317,38.184 85.641,38.184 86.344,38.887 108.914,38.887 112.887,42.86 112.887,50.561 v1(113.612,51.286)
TOUCH_RST: LCD1.8 R25.1 | length 71
  Top Layer w0.203: R25.1@53.237,33.148 54.311,33.148 v1(54.649,33.485) ; v1(113.997,36.003) 114.25,36.256 118.993,36.256 LCD1.8@118.999,36.25
  Bottom Layer w0.203: v1(54.649,33.485) 56.311,33.485 59.744,30.053 66.104,30.053 67.387,28.77 77.577,28.77 79.068,30.261 108.308,30.261 113.997,35.951 v1(113.997,36.003)
TX1: P21.4 R64.1 | length 76.6
  Top Layer w0.152: R64.1@73.147,52.091 73.151,52.087 74.111,52.087 v1(74.438,52.415)
  Bottom Layer w0.152: P21.4@21.949,79.86 24.254,79.86 28.129,83.734 46.796,83.734 55.295,75.236 55.295,68.726 61.254,62.766 70.216,62.766 71.745,61.236 71.745,53.833 73.164,52.415 v1(74.438,52.415)
UART3_RX: P4.1 P21.3 U2.4 | length 49.8
  Top Layer w0.152: v1(35.371,68.236) 35.378,68.243 39.037,68.243 U2.4@39.044,68.249 41.843,68.249 44.465,70.871 44.465,75.858 46.737,78.13 46.737,82.093 46.314,82.517 P4.1@44.898,82.517
  Bottom Layer w0.152: P21.3@19.409,79.86 19.409,77.451 21,75.86 33.327,75.86 35.371,73.816 v1(35.371,68.236)
UART3_TX: P4.3 U2.3 | length 26.6
  Top Layer w0.152: U2.3@38.943,67.59 42.949,67.59 44.828,69.469 44.828,75.182 47.306,77.659 47.306,82.978 46.609,83.675 43.96,83.675 P4.3@42.685,82.4
USB_N: P11.A7 P11.B7 U2.16 | length 32.6
  Top Layer w0.152: P11.A7@7.846,62.88 6.808,62.88 6.675,63.012 6.675,63.791 6.765,63.88 P11.B7@7.846,63.88 8.972,63.88 9.582,63.27 14.875,63.27 16.313,64.708 30.425,64.708 30.908,65.191 30.908,67.967 31.655,68.714 32.43,68.714 32.616,68.899 U2.16@33.043,68.899
USB_P: P11.A6 P11.B6 U2.17 | length 31.3
  Top Layer w0.152: P11.B6@7.846,62.38 8.856,62.38 9.306,62.83 ; P11.A6@7.846,63.38 9.077,63.38 9.306,63.15 9.306,62.83 ; U2.17@33.043,68.249 32.616,68.249 32.43,68.435 31.771,68.435 31.188,67.852 31.188,65.075 30.541,64.429 16.429,64.429 14.99,62.99 9.467,62.99 9.306,62.83
USBSS_RXN: P7.6 U1.126 | length 22.8
  Top Layer w0.13: U1.126@71.341,33.792 71.341,33.464 71.388,33.417 71.388,32.486 72.55,31.325 73.754,31.325 74.404,30.674 74.404,26.65 79.723,21.331 79.723,16.367 P7.6@78.851,15.495
USBSS_RXP: P7.5 U1.127 | length 22.8
  Top Layer w0.13: U1.127@71.691,33.792 71.691,33.464 71.645,33.417 71.645,32.593 72.656,31.581 73.86,31.581 74.661,30.78 74.661,26.756 79.979,21.438 79.979,16.367 P7.5@80.851,15.495
USBSS_TXN: C45.2 U1.123 | length 16
  Top Layer w0.13: U1.123@70.291,33.792 70.291,33.464 70.338,33.417 70.338,31.766 71.221,30.883 71.221,26.487 72.059,25.649 73.723,23.985 73.723,19.838 73.527,19.643 73.527,19.618 73.292,19.382 C45.2@73.267,19.382
USBSS_TXP: C44.2 U1.124 | length 16
  Top Layer w0.13: U1.124@70.641,33.792 70.641,33.464 70.595,33.417 70.595,31.872 71.478,30.989 71.478,26.593 72.06,26.011 73.979,24.092 73.979,19.838 74.175,19.643 74.175,19.618 74.41,19.382 C44.2@74.435,19.382
VBAT: C23.2 U1.7 VBAT1.1 | length 6.4
  Top Layer w0.127: U1.7@72.766,36.617 73.689,36.617 75.334,34.972 C23.2@75.758,34.972
  Top Layer w0.381: C23.2@75.758,34.972 75.758,35.366 76.006,35.614 77.231,35.614 VBAT1.1@77.792,35.054
VBUS_5V: P6.3 P7.1 | length 14.8
  Layer 2 w0.508: 8.541,17.318 19.801,17.318 22.327,14.792
VBUS_CC: D4.2 D5.2 IAP2.1 P10.A4 P10.B4 | length 16.3
  Top Layer w0.508: v1(37.652,9.785) 37.938,9.5 P10.A4@37.938,7.792 ; P10.B4@42.838,7.792 42.838,9.467 44.507,11.136 44.507,12.84 45.161,13.495 47.743,13.495
  Layer 2 w0.508: v1@37.958,9.379 v1@42.87,9.379
  other v1: 37.355,9.262 37.943,9.262 42.87,9.259 43.457,9.259 36.671,9.35 43.762,9.704 37.059,9.756 43.093,9.787
VBUS_FS: D4.1 D5.1 P6.9 | length 42.6
  Layer 2 w0.508: P6.9@6.397,22.793 8.487,22.793 10.924,20.356 19.828,20.356 23.755,16.429 40.436,16.429 41.69,17.683 45.791,17.683
  other v1: 45.16,15.874 45.786,15.874 44.9,16.396 45.525,16.409 45.063,16.94 45.701,16.94
VDD33: C1.1 C16.2 C26.2 C27.2 R35.1 U1.16 U1.93 U1.128 | length 40.2
  Top Layer w0.152: C1.1@58.275,35.054 58.3,35.079 59.113,35.079 ; C1.1@58.288,34.977 59.012,34.977 59.113,35.079 ; C1.1@58.461,34.831 58.512,34.882 59.055,34.882 59.74,35.567 ; U1.93@60.466,35.567 59.74,35.567 ; U1.128@72.041,33.792 72.041,33.472 72.496,33.018 72.496,32.986 C16.2@72.719,32.762 ; U1.16@72.766,39.767 74.51,39.767 ; C27.2@75.13,39.974 75.117,39.961 74.872,39.961 74.678,39.767 74.51,39.767 ; C27.2@75.301,40.032 74.943,40.032 74.859,40.116 ; C27.2@75.341,40.116 74.859,40.116 ; 59.113,35.079 59.601,35.567 59.74,35.567 ; 74.51,39.767 74.859,40.116
  Top Layer w0.381: v1(57.721,33.19) v1(57.721,33.19) 57.722,33.725 R35.1@57.723,33.726 ; v1@57.795,33.19 v1@58.141,33.19 ; 58.135,34.151 58.141,34.146 v1@58.141,33.284 ; v1(58.287,33.19) v1@58.141,33.19 ; C1.1@58.288,34.977 58.288,34.316 57.723,33.751 R35.1@57.723,33.726 ; C16.2@72.719,32.762 72.829,32.653 72.829,32.328 73.038,32.12 74.224,32.12 75.341,31.003 75.341,30.902 ; C27.2@75.341,40.116 75.366,40.116 75.45,40.2 75.45,40.466 75.742,40.759 76.982,40.759 77.186,40.555 v1(77.205,40.555) ; C26.2@77.595,40.065 77.485,40.175 77.485,40.274 v1(77.205,40.555) ; v1@77.608,40.577 77.599,40.568 77.218,40.568 v1(77.205,40.555) ; R35.1@57.723,33.726 57.723,33.701 v1@58.141,33.284 ; v1@58.141,33.19 v1@58.141,33.284 ; 75.341,30.902 v1(75.341,30.356) v1(75.887,30.356) 75.341,30.902
  Layer 2 w0.381: 57.721,30.115 v1(57.721,33.19) ; 72.615,29.24 74.301,29.24 75.417,30.356 75.417,31.133 77.255,32.972 v1@77.255,40.368
  other v1: 77.717,40.555
VDD33A: C15.2 R39.1 U1.33 | length 7.5
  Top Layer w0.152: U1.33@72.041,46.092 72.044,46.094 72.044,46.414 72.671,47.041 ; U1.33@72.09,46.307 72.75,46.967 72.75,47.121 ; C15.2@72.686,48.145 72.671,48.13 72.671,47.041 ; C15.2@72.75,48.096 72.75,47.121 ; 72.671,47.041 72.75,47.121
  Top Layer w0.508: C15.2@72.75,48.096 73.169,48.096 73.467,48.394 73.467,49.525 73.765,49.822 R39.1@74.412,49.822
VDD_1.2A: C13.2 C14.2 R27.1 U1.125 | length 6.2
  Top Layer w0.152: U1.125@70.991,33.792 70.991,32.241 72.23,31.002 72.255,31.002 C14.2@72.479,30.778 ; C14.2@72.479,30.778 C14.2@72.479,30.753 C14.2@72.479,30.778
  Top Layer w0.508: R27.1@72.479,28.271 C13.2@72.479,29.519 C14.2@72.479,30.753
VDDIO: C2.1 C5.2 C6.1 C10.1 C11.2 C12.2 C22.2 C28.1 R31.1 R33.2 R108.1 R109.1 U1.6 U1.30 U1.38 U1.51 U1.64 U1.82 U1.114 | length 142
  Top Layer w0.152: C2.1@58.288,39.352 58.397,39.461 v1(58.817,39.461) 58.86,39.418 60.465,39.418 U1.82@60.466,39.417 ; C6.1@59.403,46.752 59.499,46.847 60.756,46.847 U1.64@61.191,46.412 ; C6.1@59.404,46.987 60.754,46.987 61.191,46.55 U1.64@61.191,46.412 ; U1.64@61.191,46.092 U1.64@61.191,46.412 ; U1.114@67.141,33.792 67.141,32.659 67.439,32.362 ; v1@67.614,31.444 67.572,31.487 67.572,32.229 67.439,32.362 ; v1(67.733,31.333) 67.402,31.333 67.439,31.369 67.439,32.362 ; U1.38@70.291,46.092 70.291,47.058 70.641,47.407 70.641,47.924 C12.2@70.813,48.096 ; U1.6@72.766,36.267 73.601,36.267 75.164,34.704 ; U1.30@72.766,44.667 73.372,44.667 73.513,44.808 73.526,44.808 73.869,45.152 74.067,45.152 ; v1@75.332,33.726 75.316,33.741 v1@75.316,33.763 ; v1(75.373,33.723) 75.373,33.699 v1@75.701,33.371 ; v1@75.42,33.84 75.393,33.84 75.336,33.84 v1@75.316,33.861 ; C22.2@75.63,33.787 75.63,33.966 75.611,33.986 75.316,33.986 ; C22.2@75.758,33.763 75.47,33.763 v1@75.316,33.763 ; C22.2@75.791,33.921 75.7,34.012 75.382,34.012 75.274,34.12 ; 75.164,34.704 75.164,33.866 75.267,33.763 v1@75.316,33.763 ; 75.164,34.704 75.255,34.613 75.255,34.563 75.274,34.543 75.274,34.12 ; 75.274,33.986 75.316,33.944 ; 75.274,33.986 75.274,34.056 ; 75.274,33.986 75.316,33.986 ; 75.274,34.056 75.316,34.015 75.316,33.986 ; 75.274,34.056 75.274,34.12 ; v1@75.316,33.763 v1@75.316,33.861 ; v1@75.316,33.861 75.316,33.917 75.316,33.944 ; 75.316,33.944 75.316,33.986
  Top Layer w0.178: v1@65.552,48.271 65.569,48.255 65.569,47.655 ; v1(65.589,48.096) v1@65.654,48.096 ; v1@65.593,47.973 65.638,47.973 65.641,47.97 65.641,47.863 65.709,47.795 ; v1@65.617,48.059 v1@65.654,48.096 ; U1.51@65.741,46.092 65.741,46.775 65.569,46.948 65.569,47.655 ; C10.1@66.035,48.096 C10.1@66.01,48.096 ; 65.569,47.655 65.709,47.795 ; v1@65.654,48.096 C10.1@66.01,48.096 ; 65.709,47.795 C10.1@66.01,48.096
  Top Layer w0.381: v1(65.316,48.557) 65.316,48.538 65.575,48.279 65.575,48.113 v1@65.586,48.103 ; C28.1@74.412,45.24 74.908,45.24 75.63,45.962 75.63,46.209 v1(75.643,46.222) 75.643,48.255 76.718,49.33 R33.2@76.718,50.431 ; 75.297,33.936 75.316,33.917 75.393,33.84 v1@75.47,33.763 ; v1@75.758,33.305 75.758,33.763 C22.2@75.834,33.763 ; v1@75.881,33.182 76.205,32.858 80.887,32.858 81.394,32.35 88.21,32.35 89.192,31.367 89.192,29.643 ; v2@89.192,29.139 89.228,29.176 v2(89.852,29.176) ; v2@89.192,29.194 89.192,29.643 ; v2@89.862,29.201 89.859,29.199 89.797,29.199 89.795,29.201 89.634,29.201 89.192,29.643 ; R108.1@104.938,24.409 R109.1@106.288,24.409 v5(107.024,24.409)
  Top Layer w0.508: C6.1@59.404,46.987 C5.2@59.404,48.34 R31.1@59.404,49.791 59.404,51.113 60.142,51.851 v1(60.868,51.851) v1(61.41,51.851) ; C11.2@67.146,31.362 67.175,31.333 C11.2@67.402,31.333 ; v1(70.313,48.096) C12.2@70.813,48.096
  Layer 2 w0.381: v1(70.313,48.096) 70.331,48.096 70.497,48.262 75.082,48.262 75.658,47.686 75.658,47.017 75.643,47.002 v1(75.643,46.222) ; v5(107.024,24.409) 107.024,27.413 106.159,28.279 90.075,28.279 89.852,28.502 89.852,28.53 ; 89.528,28.853 v2(89.852,29.176) ; 89.528,28.853 v2(89.205,29.176) v2(89.852,29.176) ; 89.528,28.853 89.852,28.53 ; 89.852,28.53 v2(89.852,29.176)
  Layer 2 w0.508: v1(70.313,48.096) 70.313,46.721 70.015,46.423 65.116,46.423 ; v1(75.838,33.206) 74.808,32.176 71.979,32.176 71.136,31.333 v1(67.733,31.333) 66.651,31.333 66.354,31.631 66.354,33.217 65.821,33.75 60.656,33.75 60.474,33.932 60.474,35.333 58.879,36.928 58.879,40.845 60.176,42.143 61.593,42.143 65.116,45.666 65.116,46.423 ; 65.116,46.423 65.116,47.799 ; 65.116,47.799 65.116,48.357 v1(65.316,48.557) 65.589,48.285 v1(65.589,48.096) 65.413,48.096 65.116,47.799
  Bottom Layer w0.508: v1(60.868,51.851) v1(61.41,51.851) 63.648,51.851 ; 64.439,51.059 64.439,48.709 65.053,48.096 v1(65.589,48.096)
  other v1: 75.652,46.775
VDDK: C4.1 C24.2 C25.1 R29.1 U1.11 U1.80 | length 55.2
  Top Layer w0.152: C4.1@56.678,41.603 57.802,41.603 57.882,41.523 ; C4.1@56.737,41.523 57.882,41.523 ; C4.1@56.932,41.388 57.846,41.388 58.467,40.767 58.638,40.767 ; 59.163,40.241 58.638,40.767 ; U1.80@60.466,40.117 59.288,40.117 58.638,40.767 ; U1.11@72.766,38.017 74.041,38.017 74.614,37.444 C25.1@74.614,37.419 ; 57.882,41.523 58.638,40.767
  Top Layer w0.381: C25.1@74.614,37.419 74.724,37.309 74.724,37.023 74.979,36.768 76.467,36.768 ; C24.2@76.69,37.419 76.69,36.991 76.467,36.768 ; R29.1@81.572,37.444 78.6,37.444 77.923,36.768 76.467,36.768
  Top Layer w0.508: v1@55.972,42.943 55.972,42.819 v1(56.29,42.501) 56.682,42.109 C4.1@56.682,41.603
  Layer 2 w0.381: v1(80.896,37.48) 81.66,37.48 81.954,37.186
  Layer 2 w0.508: 52.667,42.593 51.752,41.678 51.752,36.327 52.74,35.339 56.453,35.339 ; v1@56.249,42.593 v1@56.264,42.577 ; 57.09,29.938 57.092,29.936 ; 61.483,25.545 70.427,25.545 ; 73.228,28.345 79.621,28.345 ; 81.954,30.678 81.954,37.186
  other v1: 80.362,37.48 55.988,42.945
VIO_1.8: C3.1 C7.1 C8.2 C9.1 C52.2 C53.1 C54.1 C55.1 R33.1 R97.2 R98.2 R99.2 R100.2 R101.2 R102.2 R103.2 R104.2 R105.2 U1.63 U1.81 U1.105 U10.C6 U10.M4 U10.N4 U10.P3 U10.P5 | length 172.9
  Top Layer w0.152: U10.M4@29.333,25.294 U10.N4@29.333,24.794 U10.P5@29.833,24.294 ; U10.C6@30.333,29.794 30.373,29.794 30.605,29.562 v1(30.653,29.562) ; C3.1@56.656,40.351 56.711,40.296 v1@57.704,40.296 ; C3.1@56.682,40.433 57.567,40.433 v1@57.704,40.296 ; C3.1@56.828,40.548 57.619,40.548 ; v1(57.768,40.296) v1@57.704,40.296 ; 58.06,40.326 58.038,40.347 ; U1.81@60.466,39.767 59.207,39.767 ; C7.1@60.971,47.797 60.971,47.421 61.541,46.851 61.541,46.57 ; C7.1@61.141,47.692 61.102,47.653 61.102,47.415 61.541,46.976 61.541,46.57 ; U1.63@61.541,46.092 61.541,46.57 ; U1.105@63.991,33.792 63.991,31.699 C9.1@64.086,31.604 ; 57.619,40.548 57.837,40.548 58.038,40.347 ; 57.619,40.548 57.82,40.347 58.038,40.347 ; v1@57.704,40.296 57.769,40.231 58.688,40.231 59.153,39.767 59.207,39.767 ; 58.038,40.347 58.627,40.347 59.207,39.767
  Top Layer w0.254: C53.1@28.612,19.79 28.612,19.915 28.841,20.143 ; U10.P3@28.833,24.294 28.841,24.286 28.841,20.143 ; C53.1@28.849,19.706 28.841,19.714 28.841,20.143 ; C53.1@29.106,19.877 28.841,20.143 ; U10.P5@29.833,24.294 29.833,22.672 30.246,22.259 30.246,20.09 ; C54.1@29.959,19.803 30.246,20.09 ; C54.1@30.246,19.706 30.246,20.09 ; 30.246,20.267 30.246,20.09
  Top Layer w0.381: C9.1@63.903,31.598 63.906,31.601 64.53,31.601 v1(64.534,31.604)
  Top Layer w0.508: C52.2@26.182,19.706 27.877,19.706 v1(27.891,19.72) 27.904,19.706 C53.1@28.849,19.706 C54.1@30.246,19.706 ; v1(28.886,35.463) 28.889,35.466 C55.1@30.071,35.466 30.068,35.463 v1(29.486,35.463) ; R105.2@39.855,24.721 R100.2@39.855,25.949 R102.2@39.855,27.178 R103.2@39.855,28.406 R99.2@39.855,29.634 R101.2@39.855,30.863 R98.2@39.855,32.091 R97.2@39.855,33.32 R104.2@39.855,34.548 v1(39.855,35.172) ; C7.1@60.971,47.797 60.562,47.797 60.264,48.095 60.264,49.567 60.562,49.865 C8.2@60.971,49.865 60.997,49.89 61.697,49.89 v1@61.722,49.865 ; R33.1@76.718,51.281 77.376,51.281 ; v1(78.109,51.268) 77.897,51.057 v1(77.897,50.76) 77.376,51.281 ; v1@78.109,51.281 77.376,51.281
  Layer 2 w0.381: 55.922,37.271 55.922,40.008 56.146,40.231 58.116,40.231 58.116,41.469 59.902,43.255 61.595,43.255 62.794,44.453 62.794,49.201 62.333,49.662 v1(61.722,49.662) ; 59.401,33.792 59.401,32.173 59.97,31.604 v1(64.534,31.604)
  Layer 2 w0.508: v1@27.891,20.462 36.511,20.462 39.855,23.806 v1(39.855,35.172) ; 41.636,45.113 41.636,49.279
  Layer 2 w0.762: v1(27.891,19.72) 27.891,20.462 27.891,29.965 28.337,30.411 31.687,30.411 32.197,30.922 32.197,35.463 v1(29.486,35.463) ; v1@30.78,29.718 30.78,30.26 ; 47.115,49.279 49.318,51.482 v1(55.434,51.482)
  Bottom Layer w0.508: v1(61.722,50.229) v1@61.722,50.095 ; 77.087,50.085 70.748,50.085 69.073,51.759 67.145,51.759 66.848,51.462 66.848,46.816 66.55,46.519 63.184,46.519 62.887,46.816 62.887,46.97 ; 55.704,51.212 v1(55.434,51.482) 55.434,51.765 v1(55.704,52.035) 55.704,51.212 ; 55.704,51.212 56.462,50.453 56.462,47.763 57.255,46.97 62.887,46.97 ; v1@61.722,50.095 v1(61.722,49.662) 62.156,49.662 ; v1@61.722,50.095 62.156,49.662 ; 62.156,49.662 62.887,48.931 62.887,46.97
  other v1: 27.891,20.246 57.221,40.462
VREF: C29.2 R37.1 U1.32 | length 8.7
  Top Layer w0.152: U1.32@72.766,45.367 73.193,45.367 ; C29.2@74.16,47.518 73.394,46.752 73.394,45.568 73.193,45.367 ; C29.2@74.462,47.645 73.479,46.662 73.479,45.552 73.294,45.367 73.193,45.367
  Top Layer w0.381: C29.2@74.412,47.57 74.522,47.679 74.746,47.679 75.055,47.988 75.055,48.612 75.582,49.139 R37.1@75.582,49.822
X32KI: C18.1 R2.1 Y2.1 | length 5.4
  Top Layer w0.127: R2.1@80.311,34.494 81.282,34.494 81.342,34.494 C18.1@81.518,34.494 81.518,34.974 81.592,35.048 83.416,35.048 84.641,33.823 Y2.1@84.678,33.823
X32KO: C21.1 R4.1 Y2.2 | length 5.5
  Top Layer w0.127: R4.1@80.293,35.695 C21.1@81.518,35.695 81.518,36.099 82.188,36.769 83.778,36.769 84.224,36.323 Y2.2@84.678,36.323 ; Y2.2@84.474,36.224 Y2.2@84.668,36.031
XI: C17.2 U1.23 Y1.1 | length 11.3
  Top Layer w0.152: U1.23@72.766,42.217 73.987,42.217 74.62,42.849 76.694,42.849 77.604,43.759 77.951,43.759 78.088,43.622 78.088,43.272 78.313,43.047 81.457,43.047 82.418,44.008 Y1.1@82.418,44.077
XO: C20.2 R78.2 U1.24 Y1.3 | length 10.7
  Top Layer w0.152: U1.24@72.766,42.567 73.942,42.567 74.504,43.129 76.358,43.129 78.112,44.883 C20.2@78.112,44.914 ; C20.2@78.127,44.923 R78.2@78.127,46.128 78.127,46.689 78.217,46.778 80.117,46.778 Y1.3@80.518,46.377
pads on no net: ?.0 LCD1.0 P10.A8 P10.B8 P11.A8 P11.B8 P12.17 P13. P13.7 S4.0 S4.3 U2.2 U2.5 U4.1 U10.A1 U10.A8 U10.A9 U10.A10 U10.A11 U10.A12 U10.A13 U10.A14 U10.B8 U10.B9 U10.B10 U10.B11 U10.B12 U10.B13 U10.B14 U10.C8 U10.C9 U10.C10 U10.C11 U10.C12 U10.C13 U10.C14 U10.D1 U10.D2 U10.D12 U10.D13 U10.D14 U10.E1 U10.E2 U10.E3 U10.E5 U10.E8 U10.E9 U10.E10 U10.E12 U10.E13 U10.E14 U10.F1 U10.F2 U10.F3 U10.F10 U10.F12 U10.F13 U10.F14 U10.G1 U10.G2 U10.G3 U10.G10 U10.G12 U10.G13 U10.G14 U10.H1 U10.H2 U10.H3 U10.H12 U10.H13 U10.H14 U10.J1 U10.J2 U10.J3 U10.J12 U10.J13 U10.J14 U10.K1 U10.K2 U10.K3 U10.K6 U10.K7 U10.K10 U10.K12 U10.K13 U10.K14 U10.L1 U10.L2 U10.L3 U10.L12 U10.L13 U10.L14 U10.M1 U10.M2 U10.M3 U10.M7 U10.M8 U10.M9 U10.M10 U10.M11 U10.M12 U10.M13 U10.M14 U10.N3 U10.N6 U10.N7 U10.N8 U10.N9 U10.N10 U10.N11 U10.N12 U10.N13 U10.N14 U10.P1 U10.P2 U10.P7 U10.P8 U10.P9 U10.P10 U10.P11 U10.P12 U10.P13 U10.P14 U11.2 U11.3 U11.4 U11.9 U11.10 U11.11 U13.40 U14.5

## Polygon pours and split planes (outlines as drawn)
NetF1_2 on Top Layer "NetF1_2" (solid, remove dead copper, pour order 3): 4.947,49.299 7.806,49.299 9.043,48.062 12.96,48.062 13.152,48.254 13.152,50.224 13.008,50.369 9.332,50.369 8.647,51.053 4.94,51.053 4.788,50.902 4.788,49.436
DC_5V on Top Layer "DC_5V" (solid, remove dead copper, pour order 2): 13.021,32.056 12.758,32.318 12.758,34.655 12.903,34.8 20.129,34.8 20.48,34.449 20.48,26.501 20.034,26.055 11.419,26.055 11.261,25.897 11.261,19.647 10.814,19.2 5.689,19.2 5.574,19.29 5.574,21.215 5.637,21.277 8.055,21.277 8.122,21.344 8.122,27.987 8.25,28.115 17.121,28.115 17.28,28.274 17.28,31.916 17.14,32.056
NetP6_2 on Top Layer "NetP6_2" (solid, remove dead copper, pour order 1): 4.189,24.002 4.843,23.348 4.843,12.078 4.558,11.793 1.953,11.793 1.618,12.129 1.618,48.609 1.996,48.987 6.456,48.987 6.596,48.848 6.596,47.361 6.481,47.265 4.479,47.265 4.189,46.975
5V on Top Layer "5V" (solid, remove dead copper, pour order 5): 16.202,12.726 16.732,12.197 21.885,12.197 22.297,11.785 22.297,11.39 22.671,11.016 24.403,11.016 24.504,11.117 24.48,11.141 24.48,15.275 24.292,15.463 22.76,15.463 22.45,15.153 22.475,14.123 22.148,13.796 17.947,13.796 17.688,14.055 17.688,18.51 17.627,18.571 13.706,18.571 13.499,18.778 13.499,25.377 13.45,25.427 11.964,25.427 11.895,25.315 11.895,16.776 12.678,15.994 16.058,15.994 16.202,15.849
GND on Top Layer "GND-L1" (solid, remove dead copper, pour order 26): -0.035,84.868 -0.035,0.128 124.898,0.128 124.898,85.184
5V on Layer 2 "5V" (solid, remove dead copper, pour order 4): 26.503,71.362 26.615,71.475 26.615,76.428 26.752,76.588 34.022,76.588 34.119,76.685 34.119,80.53 34.322,80.733 35.767,80.733 35.976,80.525 35.976,75.185 35.771,74.98 29.246,74.98 29.112,74.879 29.112,68.711 28.865,68.463 23.207,68.463 23.083,68.339 23.083,59.899 18.876,55.692 18.876,25.695 18.704,25.523 15.415,25.523 15.288,25.396 15.294,25.389 15.294,23.92 15.125,23.751 11.619,23.751 11.471,23.9 11.471,27.725 11.635,27.889 14.872,27.889 15.29,28.308 15.29,55.356 20.332,60.397 20.332,71.339 20.355,71.362
1V2 on Layer 2 "1V2" (solid, remove dead copper, pour order 6): 72.458,20.6 72.291,20.486 38.922,20.486 37.539,19.104 27.146,19.104 27.054,19.195 27.054,20.478 26.98,20.566 23.771,20.566 23.558,20.779 23.558,21.32 23.48,21.398 23.4,21.478 22.082,21.478 22.019,21.415 22.019,19.449 23.962,17.506 40.045,17.506 40.98,18.44 83.858,18.44 84.484,19.067 84.39,38.01 84.367,38.034 82.546,38.034 82.478,37.965 82.478,27.917 82.24,27.679 73.477,27.679 73.139,27.341 72.695,27.327 72.458,27.09
VIO_1.8 on Layer 2 "VIO_1.8" (solid, remove dead copper, pour order 9): 42.622,20.698 42.855,20.93 42.855,22.48 43.007,22.632 43.923,22.632 43.996,22.705 43.996,46.561 44.186,46.766 47.563,46.766 51.215,50.418 55.899,50.418 55.979,50.483 55.979,52.428 55.841,52.566 49.316,52.566 46.332,49.581 39.284,49.581 39.156,49.455 39.156,24.56 35.381,20.785 28.767,20.785 28.492,21.06 28.492,29.754 28.666,29.928 30.008,29.928 30.579,29.357 32.377,29.357 33.118,30.099 33.118,36.008 32.602,36.524 28.75,36.524 28.627,36.4 28.627,34.727 28.73,34.623 31.231,34.623 31.447,34.407 31.447,31.313 31.215,31.08 27.499,31.08 27.372,30.953 27.372,19.553 27.469,19.456 37.545,19.456 38.786,20.698